# EAGLE board CT_schematic (EAGLE 7.6.0)

Size 100 x 80 mm. Coordinates in mm from the lower left corner, seen from the top.
Outline: 0,0 100,0 100,80 0,80 0,0
Copper layers (1*16): Top 0.035mm / dielectric 1.5mm / Bottom 0.035mm
Design rules "default": minimum track width 10mil, minimum drill 24mil, track to track 8mil, track to pad 8mil, pad to pad 8mil, via to via 8mil, smd to smd 8mil, copper to edge 40mil, drill to drill 8mil, minimum pad ring 10mil, minimum via ring 8mil, stop-mask expansion 4mil, vias tented up to drill 0mil, thermal gap 10mil

## Footprints (pad centres in the part's own frame; a part is rotated, then mirrored left to right if it is on the bottom)
C0603 = smd 0.8 x 0.8: 1 -0.762,0; 2 0.762,0
C0402 = smd 0.5 x 0.5: 1 -0.508,0; 2 0.508,0
EXV-9B = smd 2.718 x 1.778: 1 -2.108,0; 2 2.108,0
C1210 = smd 1.2 x 2.5: 1 -1.524,0; 2 1.524,0
EXV-9H = smd 3.505 x 1.676: 1 -2.857,0; 2 2.857,0
L0603 = smd 0.8 x 0.8: 1 -0.762,0; 2 0.762,0
PJ-037B_PACKAGE = drill 3.7 square: 1 12,0 | drill 3.2 square: 2 6,0
R0603 = smd 0.8 x 0.8: 1 -0.762,0; 2 0.762,0
WLCSP49 = smd 0.25 x 0.25: A1 -1.2,1.2; A2 -0.8,1.2; A3 -0.4,1.2; A4 0,1.2; A5 0.4,1.2; A6 0.8,1.2; A7 1.2,1.2; B1 -1.2,0.8; B2 -0.8,0.8; B3 -0.4,0.8; B4 0,0.8; B5 0.4,0.8; B6 0.8,0.8; B7 1.2,0.8; C1 -1.2,0.4; C2 -0.8,0.4; C3 -0.4,0.4; C4 0,0.4; C5 0.4,0.4; C6 0.8,0.4; C7 1.2,0.4; D1 -1.2,0; D2 -0.8,0; D3 -0.4,0; D4 0,0; D5 0.4,0; D6 0.8,0; D7 1.2,0; E1 -1.2,-0.4; E2 -0.8,-0.4; E3 -0.4,-0.4; E4 0,-0.4; E5 0.4,-0.4; E6 0.8,-0.4; E7 1.2,-0.4; F1 -1.2,-0.8; F2 -0.8,-0.8; F3 -0.4,-0.8; F4 0,-0.8; F5 0.4,-0.8; F6 0.8,-0.8; F7 1.2,-0.8; G1 -1.2,-1.2; G2 -0.8,-1.2; G3 -0.4,-1.2; G4 0,-1.2; G5 0.4,-1.2; G6 0.8,-1.2; G7 1.2,-1.2
SOT-23-6 = smd 1.1 x 0.6: 1 -1.4,0.95; 2 -1.4,0; 3 -1.4,-0.95; 4 1.4,-0.95; 5 1.4,0; 6 1.4,0.95
LGA-14 = smd 0.675 x 0.25: 1 -1.262,0.75; 2 -1.262,0.25; 3 -1.262,-0.25; 4 -1.262,-0.75; 8 1.262,-0.75; 9 1.262,-0.25; 10 1.262,0.25; 11 1.262,0.75 | smd 0.25 x 0.675: 5 -0.5,-1.012; 6 0,-1.012; 7 0.5,-1.012; 12 0.5,1.012; 13 0,1.012; 14 -0.5,1.012
SAMTEC_FTSH-105-01-L-DV-K = smd 0.762 x 2.794: 1 -2.54,-2.032; 2 -2.54,2.032; 3 -1.27,-2.032; 4 -1.27,2.032; 5 0,-2.032; 6 0,2.032; 7 1.27,-2.032; 8 1.27,2.032; 9 2.54,-2.032; 10 2.54,2.032
MICRO_USB_AB = smd 0.4 x 1.35: 1 1.3,0.26; 2 0.65,0.26; 3 0,0.26; 4 -0.65,0.26; 5 -1.3,0.26 | drill 0.6 pad 0.95 long: 6 4.175,-2.54; 7 -4.175,-2.54 | drill 0.7 pad 1.1 long: 8 -2.225,0.46; 9 2.225,0.46
SOT143B = smd 1 x 0.7: 1 -0.75,-1 | smd 0.6 x 0.7: 2 0.95,-1; 3 0.95,1; 4 -0.95,1
ASEK = smd 1.4 x 1: 1 -1.1,-0.8; 2 1.1,-0.8; 3 1.1,0.8; 4 -1.1,0.8
ASFL1 = smd 1.7 x 1.5: 1 -1.27,-1.1; 2 1.27,-1.1; 3 1.27,1.1; 4 -1.27,1.1
LP2954 = smd 1.6 x 0.6: 1 -2.475,1.905 | smd 1.55 x 0.6: 2 -2.475,0.635; 3 -2.475,-0.635; 4 -2.475,-1.905; 5 2.475,-1.905; 6 2.475,-0.635; 7 2.475,0.635; 8 2.475,1.905
WSON-8 = smd 0.3 x 0.6: 1 -0.75,0; 2 0.05,0; 3 0.85,0; 4 1.65,0; 5 1.65,3.8; 6 0.85,3.8; 7 0.05,3.8; 8 -0.75,3.8 | smd 3 x 2.6: PAD 0.45,1.9
SON-6 = smd 0.55 x 0.3: 1 -0.355,0.5 | smd 0.52 x 0.3: 2 -0.37,0; 3 -0.37,-0.5; 4 0.37,-0.5; 5 0.37,0; 6 0.37,0.5
SW_4-1437565-2 = smd 1.4 x 2.1: 1 -2.23,4.55; 2 -2.23,-4.55; 3 2.23,4.55; 4 2.23,-4.55
LGM67K-G1J2-24-Z = smd 0.8 x 1.4: A -2,0; C 0,0
NC7SZ125M5X = smd 1.3 x 0.7: 1 -1.3,0.95; 2 -1.3,0; 3 -1.3,-0.95; 4 1.3,-0.95; 5 1.3,0.95

## Placement (x,y rotation side)
C1  1e-06  [C0603]  -52.07,57.15 0 top  (outside the outline)
C2  1e-07  [C0603]  -55.88,57.15 0 top  (outside the outline)
C3  1e-07  [C0603]  -59.69,57.15 0 top  (outside the outline)
C4  1e-07  [C0603]  -63.5,57.15 0 top  (outside the outline)
C5  1e-07  [C0603]  -67.31,57.15 0 top  (outside the outline)
C6  1e-07  [C0603]  -15.24,62.23 0 top  (outside the outline)
C7  4.7e-06  [C0603]  -44.45,57.15 0 top  (outside the outline)
C8  2.2e-06  [C0603]  -48.26,57.15 0 top  (outside the outline)
C9  1e-08  [C0603]  -19.05,62.23 0 top  (outside the outline)
C10  1e-06  [C0603]  -22.86,62.23 0 top  (outside the outline)
C11  1e-07  [C0402]  -64.77,62.23 0 top  (outside the outline)
C12  1e-07  [C0402]  -68.58,62.23 0 top  (outside the outline)
C13  1e-07  [C0402]  -15.24,67.31 0 top  (outside the outline)
C14  1e-08  [C0402]  -19.05,67.31 0 top  (outside the outline)
C15  1e-08  [C0402]  -22.86,67.31 0 top  (outside the outline)
C16  1e-06  [EXV-9B]  -24.13,45.72 0 top  (outside the outline)
C17  2.2e-06  [EXV-9B]  -33.02,45.72 0 top  (outside the outline)
C18  1e-08  [C0402]  -26.67,67.31 0 top  (outside the outline)
C19  1e-05  [C1210]  -63.5,38.1 0 top  (outside the outline)
C20  1e-05  [C1210]  -16.51,46.99 0 top  (outside the outline)
C21  1e-07  [C0402]  -30.48,67.31 0 top  (outside the outline)
C22  0.0001  [EXV-9H]  -55.88,30.48 0 top  (outside the outline)
C23  0.0001  [EXV-9H]  -17.78,39.37 0 top  (outside the outline)
C24  1e-08  [C0402]  -34.29,67.31 0 top  (outside the outline)
C25  1e-08  [C0402]  -38.1,67.31 0 top  (outside the outline)
F1  240.0  [L0603]  -26.67,62.23 0 top  (outside the outline)
J1  PJ-037B  [PJ-037B_PACKAGE]  -57.15,7.62 0 top  (outside the outline)
R1  10000.0  [R0603]  -40.64,52.07 0 top  (outside the outline)
R2  1000.0  [R0603]  -30.48,62.23 0 top  (outside the outline)
R3  1600.5  [R0603]  -34.29,62.23 0 top  (outside the outline)
R4  4700.0  [R0603]  -38.1,62.23 0 top  (outside the outline)
R5  2200.0  [R0603]  -41.91,62.23 0 top  (outside the outline)
R6  2200.0  [R0603]  -45.72,62.23 0 top  (outside the outline)
R7  47000.0  [R0603]  -45.72,52.07 0 top  (outside the outline)
R8  10000.0  [R0603]  -50.8,52.07 0 top  (outside the outline)
R9  10000.0  [R0603]  -55.88,52.07 0 top  (outside the outline)
R10  10000.0  [R0603]  -60.96,52.07 0 top  (outside the outline)
R11  10000.0  [R0603]  -66.04,52.07 0 top  (outside the outline)
R12  10000.0  [R0603]  -15.24,57.15 0 top  (outside the outline)
R13  10000.0  [R0603]  -20.32,57.15 0 top  (outside the outline)
R14  10000.0  [R0603]  -25.4,57.15 0 top  (outside the outline)
R15  10000.0  [R0603]  -30.48,57.15 0 top  (outside the outline)
R16  5.0  [R0603]  -49.53,62.23 0 top  (outside the outline)
R17  100000.0  [R0603]  -64.77,45.72 0 top  (outside the outline)
R18  100000.0  [R0603]  -15.24,52.07 0 top  (outside the outline)
R19  164658.62  [R0603]  -59.69,45.72 0 top  (outside the outline)
R20  100000.0  [R0603]  -20.32,52.07 0 top  (outside the outline)
R21  100000.0  [R0603]  -25.4,52.07 0 top  (outside the outline)
R22  3900.0  [R0603]  -53.34,62.23 0 top  (outside the outline)
R23  1000.0  [R0603]  -57.15,62.23 0 top  (outside the outline)
R24  10000.0  [R0603]  -35.56,57.15 0 top  (outside the outline)
R25  10000.0  [R0603]  -40.64,57.15 0 top  (outside the outline)
R26  9100.0  [R0603]  -60.96,62.23 0 top  (outside the outline)
R27  680000.0  [R0603]  -30.48,52.07 0 top  (outside the outline)
R28  120000.0  [R0603]  -35.56,52.07 0 top  (outside the outline)
U1  STM32F401CDY6  [WLCSP49]  -35.56,39.37 0 top  (outside the outline)
U2  MAX4995AAUT+T  [SOT-23-6]  -40.64,45.72 0 top  (outside the outline)
U3  BMG250  [LGA-14]  -44.45,38.1 0 top  (outside the outline)
U4  FTSH-105-01-L-DV-K  [SAMTEC_FTSH-105-01-L-DV-K]  -35.56,7.62 0 top  (outside the outline)
U5  47590-0001  [MICRO_USB_AB]  -66.04,7.62 0 top  (outside the outline)
U6  prtr5v0u2ax  [SOT143B]  -50.8,67.31 0 top  (outside the outline)
U7  ASEK-32.768KHz-ECST  [ASEK]  -46.99,30.48 0 top  (outside the outline)
U8  ASFL1-25MHZ-NCS  [ASFL1]  -26.67,30.48 0 top  (outside the outline)
U9  LP2954AIMX/NOPB  [LP2954]  -44.45,19.05 0 top  (outside the outline)
U10  LP3878SDX-ADJ/NOPB  [WSON-8]  -66.04,17.78 0 top  (outside the outline)
U11  TPS3895ADRYR  [SON-6]  -54.61,66.04 0 top  (outside the outline)
U12  4-1437565-2  [SW_4-1437565-2]  -27.94,20.32 0 top  (outside the outline)
U13  Q65110A2395  [LGM67K-G1J2-24-Z]  -52.07,38.1 0 top  (outside the outline)
U14  nc7sz125m5x  [NC7SZ125M5X]  -45.72,45.72 0 top  (outside the outline)
U15  nc7sz125m5x  [NC7SZ125M5X]  -52.07,45.72 0 top  (outside the outline)

## Library data of the parts
C1-C25 F1 J1 R1-R28 U1-U15 = circuit_tree

## Nets
CLK_U1_C7: U1.C7 U7.3
CLK_U1_D7: U1.D7 U8.3
GND: C1.2 C2.2 C3.2 C4.2 C5.2 C6.2 C7.2 C8.2 C9.2 C10.2 C11.2 C12.2 C13.2 C14.2 C15.2 C16.2 C17.2 C18.2 C19.2 C20.2 C21.2 C22.2 C23.2 C24.2 C25.2 J1.2 R2.2 R7.2 R8.2 R11.2 R16.2 R20.2 R23.2 R26.2 R28.2 U1.A6 U1.B1 U1.D3 U1.E6 U2.2 U3.1 U3.6 U3.7 U4.3 U4.5 U5.5 U5.6 U5.7 U5.8 U5.9 U6.1 U7.2 U8.2 U9.4 U10.3 U10.PAD U11.2 U13.C U14.2 U14.3 U15.1 U15.3
NET_U1_A5: R8.1 U1.A5
NET_U1_B5: R5.1 U1.B5 U3.13
NET_U1_B6: R9.1 U1.B6
NET_U1_C5: R6.1 U1.C5 U3.14
NET_U1_E7: R4.1 U1.E7 U15.4
NET_U1_F7: C9.1 C10.1 F1.1 U1.F7
NET_U1_G2: C8.1 U1.G2
NET_U1_G6: R3.1 U1.G6 U13.A
NET_U1_G7: R1.1 U1.G7 U12.3 U12.4
NET_U2_3: R7.1 U2.3
NET_U3_12: R12.1 U3.12
NET_U4_9: R16.1 U4.9
NET_U9_3: R18.1 U9.3
NET_U9_5: R17.1 U9.5
NET_U9_7: R19.2 R20.1 U9.7
NET_U10_1: C18.1 U10.1
NET_U10_6: R22.2 R23.1 U10.6
NET_U10_8: R21.1 U10.8
NET_U11_1: R25.1 R26.1 U11.1
NET_U11_3: R27.2 R28.1 U11.3
NET_U11_4: R24.1 U11.4 U14.4 U15.2
NET_U12_1: R2.1 U12.1 U12.2
PROC_GPIO_TO_U1_USB_FAULT: R10.1 U1.A4 U2.6
PROC_GPIO_TO_U1_VBUS_EN: R11.1 U1.A2 U2.4
PROC_GPIO_TO_U3_INT1: U1.B4 U3.4
PROC_SYS_JTCK_SWCLK: R14.1 U1.A1 U4.4
PROC_SYS_JTDO_SWO: U1.A3 U4.6
PROC_SYS_JTMS_SWDIO: R15.1 U1.B3 U4.2
PROC_USB_OTG_FS_DM: U1.C1 U5.2 U6.3
PROC_USB_OTG_FS_DP: U1.C3 U5.3 U6.2
PROC_USB_OTG_FS_ID: U1.C2 U5.4
PROC_USB_OTG_FS_VBUS: U1.D2 U2.1 U5.1 U6.4
RST_OUT_U4_JTAG_RST_B: R13.1 U4.10 U14.1
VCC_S1_12V5: C16.1 C19.1 C22.1 C23.1 J1.1 R18.2 R21.2 U9.8 U10.4
VCC_TIER1_3V3: C1.1 C2.1 C3.1 C4.1 C5.1 C6.1 C7.1 C11.1 C12.1 C13.1 C14.1 C15.1 C17.1 C21.1 C24.1 C25.1 F1.2 R1.2 R3.2 R4.2 R5.2 R6.2 R9.2 R10.2 R12.2 R13.2 R14.2 R15.2 R17.2 R19.1 R24.2 R25.2 R27.1 U1.A7 U1.B2 U1.B7 U1.F2 U3.5 U3.8 U4.1 U7.4 U8.4 U9.1 U11.6 U14.5 U15.5
VCC_TIER1_5V0: C20.1 R22.1 U2.5 U10.5

## Tracks (layer width: path | path; a pad name or v marks a point on that pad's centre or on a via)
CLK_U1_C7  (1 unrouted)
CLK_U1_D7  (1 unrouted)
GND  (61 unrouted)
NET_U1_A5  (1 unrouted)
NET_U1_B5  (2 unrouted)
NET_U1_B6  (1 unrouted)
NET_U1_C5  (2 unrouted)
NET_U1_E7  (2 unrouted)
NET_U1_F7  (3 unrouted)
NET_U1_G2  (1 unrouted)
NET_U1_G6  (2 unrouted)
NET_U1_G7  (3 unrouted)
NET_U2_3  (1 unrouted)
NET_U3_12  (1 unrouted)
NET_U4_9  (1 unrouted)
NET_U9_3  (1 unrouted)
NET_U9_5  (1 unrouted)
NET_U9_7  (2 unrouted)
NET_U10_1  (1 unrouted)
NET_U10_6  (2 unrouted)
NET_U10_8  (1 unrouted)
NET_U11_1  (2 unrouted)
NET_U11_3  (2 unrouted)
NET_U11_4  (3 unrouted)
NET_U12_1  (2 unrouted)
PROC_GPIO_TO_U1_USB_FAULT  (2 unrouted)
PROC_GPIO_TO_U1_VBUS_EN  (2 unrouted)
PROC_GPIO_TO_U3_INT1  (1 unrouted)
PROC_SYS_JTCK_SWCLK  (2 unrouted)
PROC_SYS_JTDO_SWO  (1 unrouted)
PROC_SYS_JTMS_SWDIO  (2 unrouted)
PROC_USB_OTG_FS_DM  (2 unrouted)
PROC_USB_OTG_FS_DP  (2 unrouted)
PROC_USB_OTG_FS_ID  (1 unrouted)
PROC_USB_OTG_FS_VBUS  (3 unrouted)
RST_OUT_U4_JTAG_RST_B  (2 unrouted)
VCC_S1_12V5  (8 unrouted)
VCC_TIER1_3V3  (45 unrouted)
VCC_TIER1_5V0  (3 unrouted)